# EAGLE board 22257 v10 (EAGLE 9.7.0)
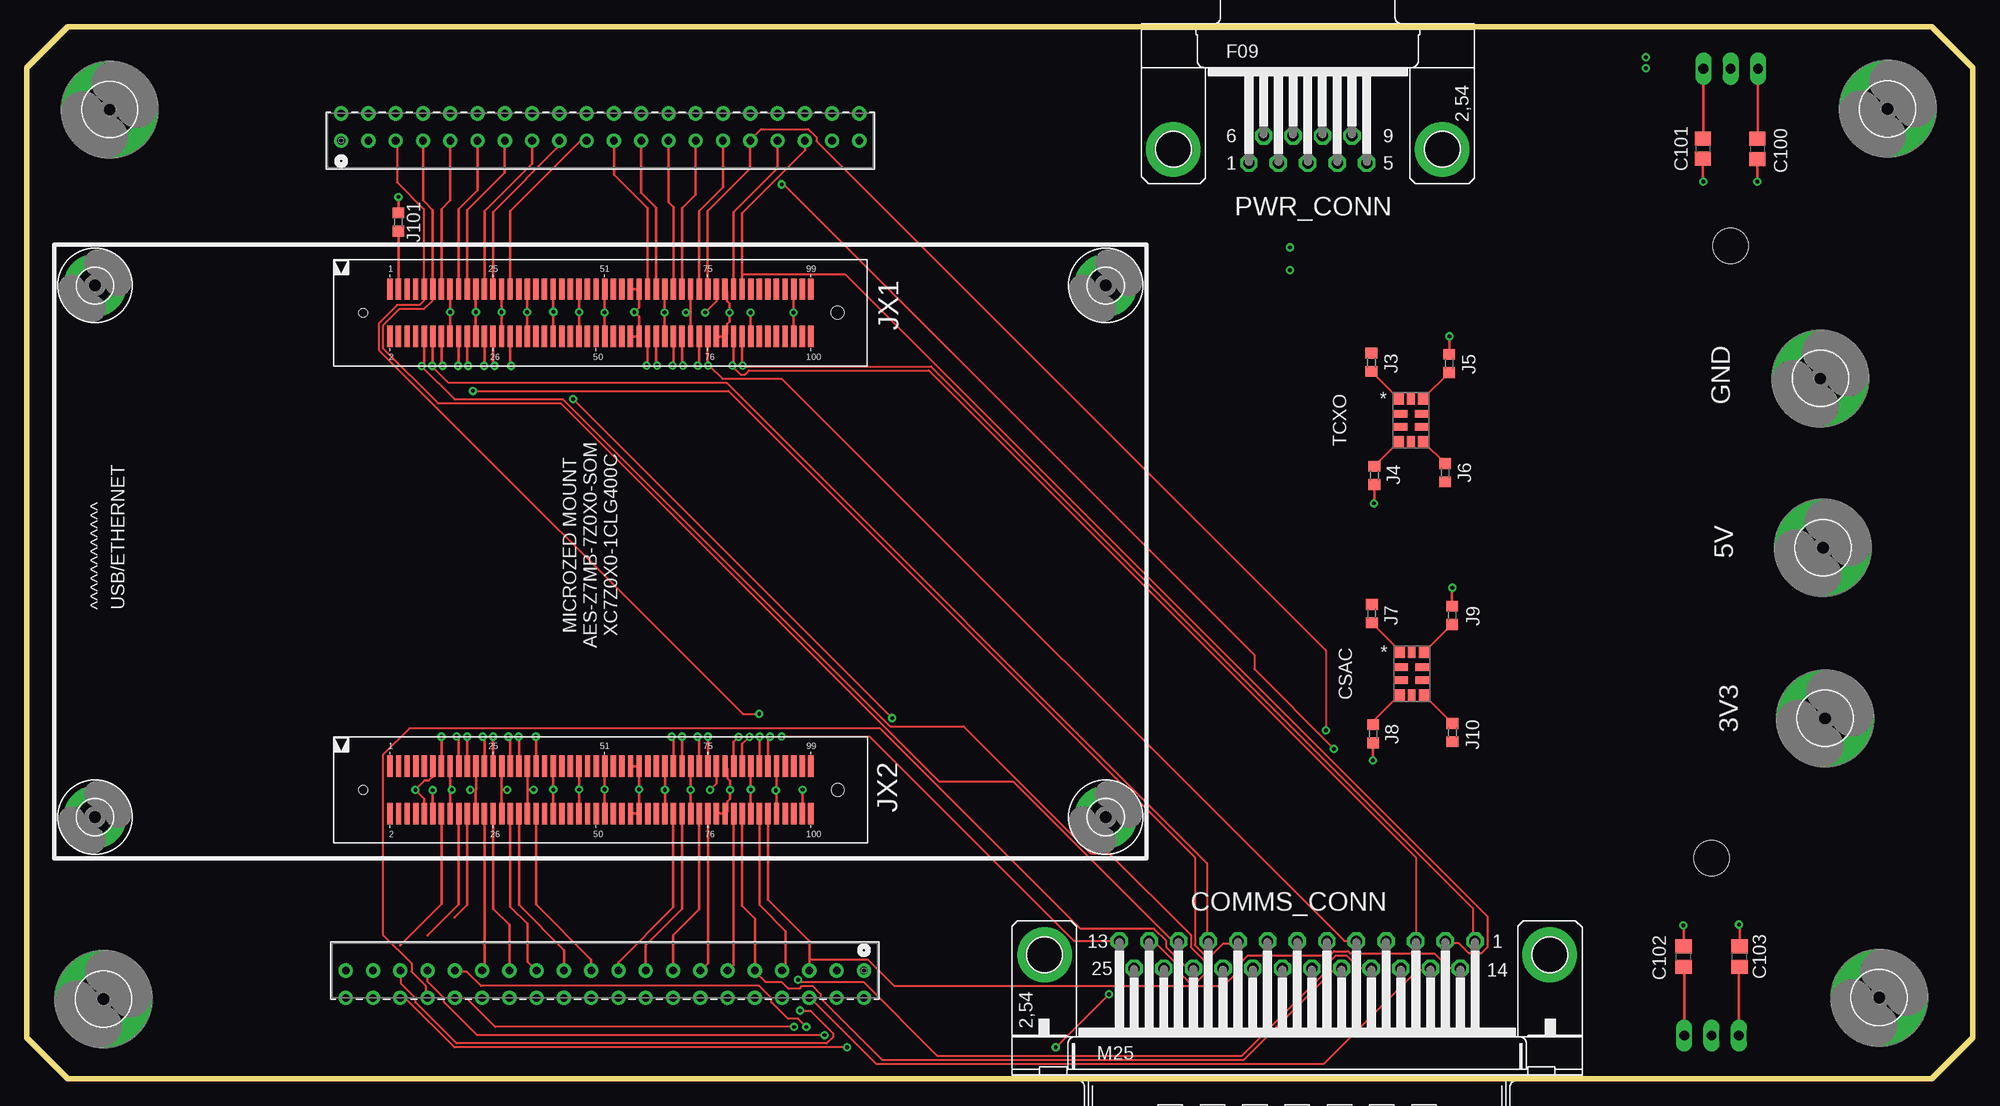
[diagram p0: board, top side]
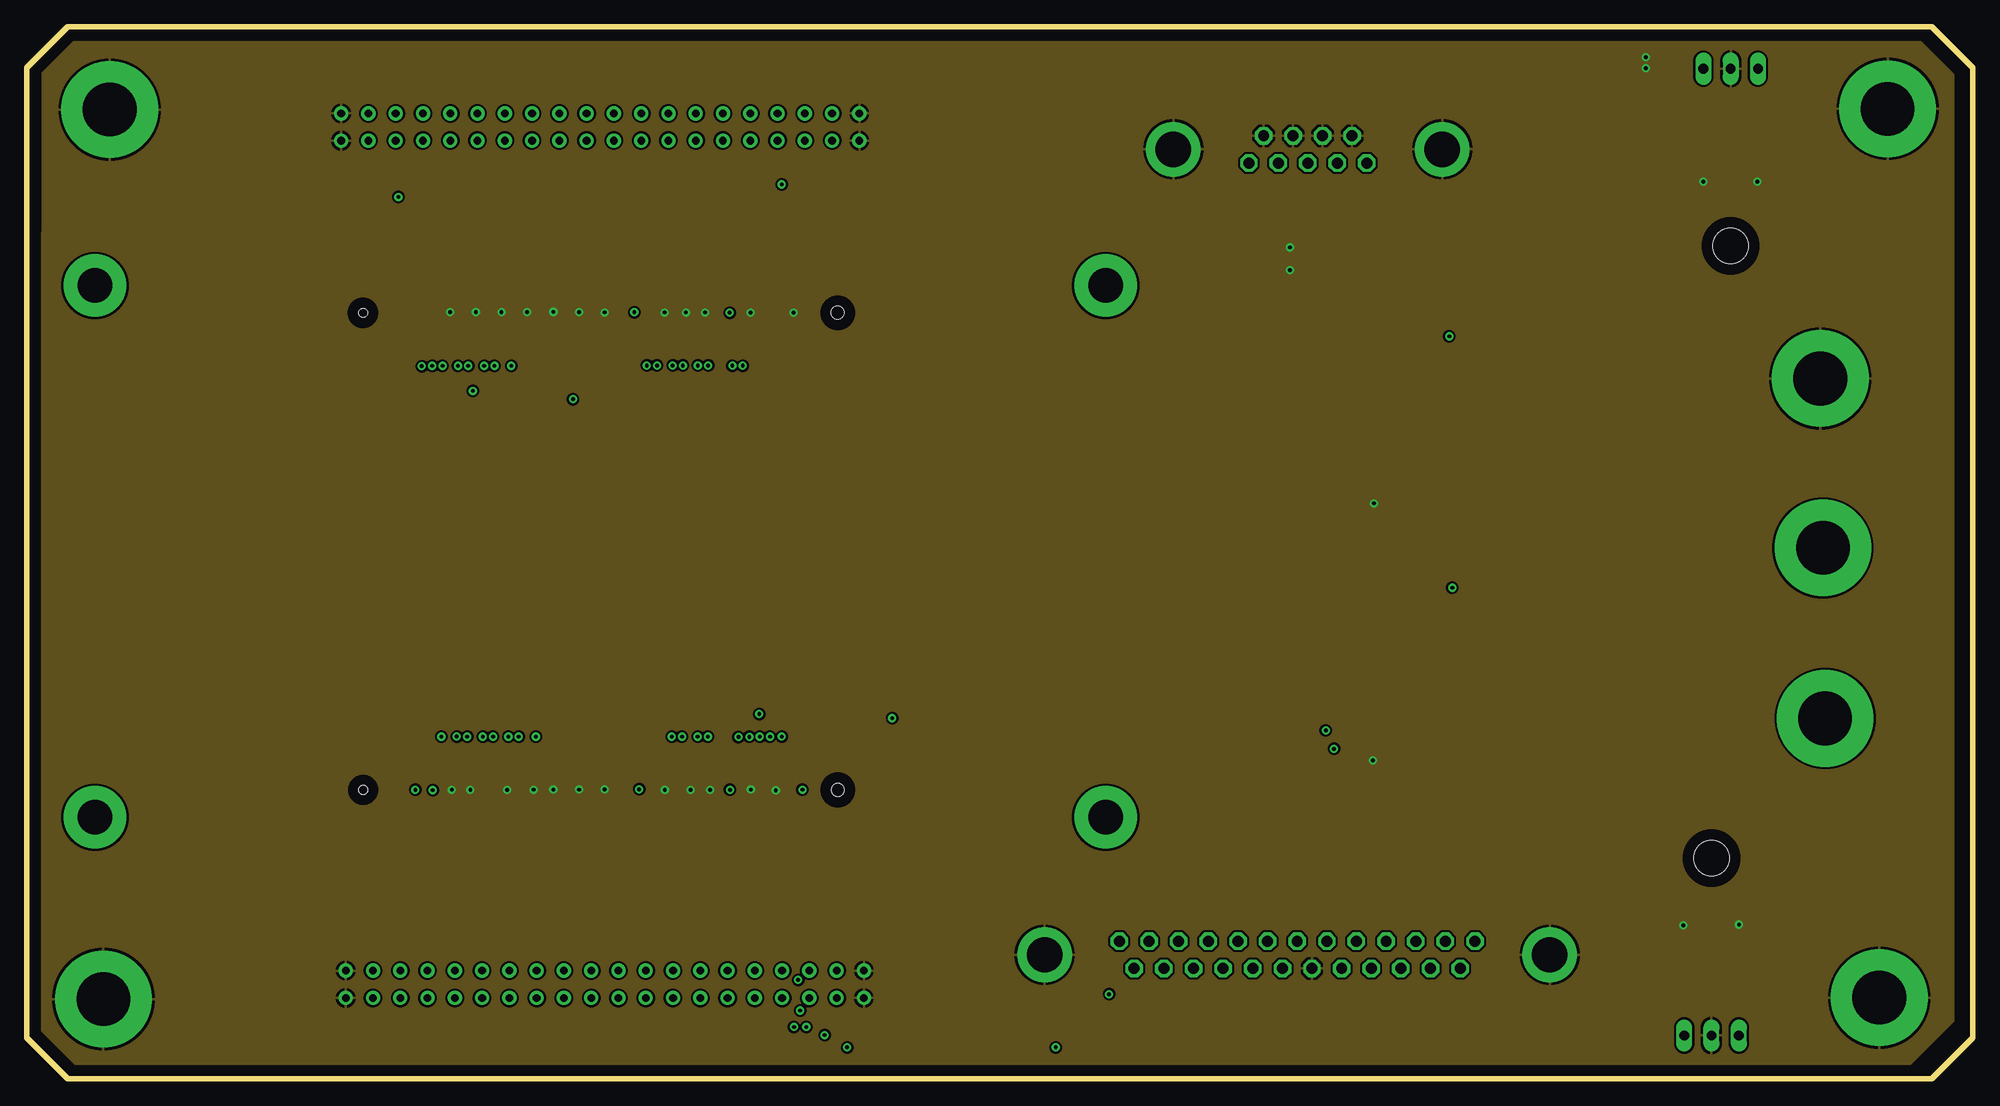
[diagram p1: board, inner layer Route2]
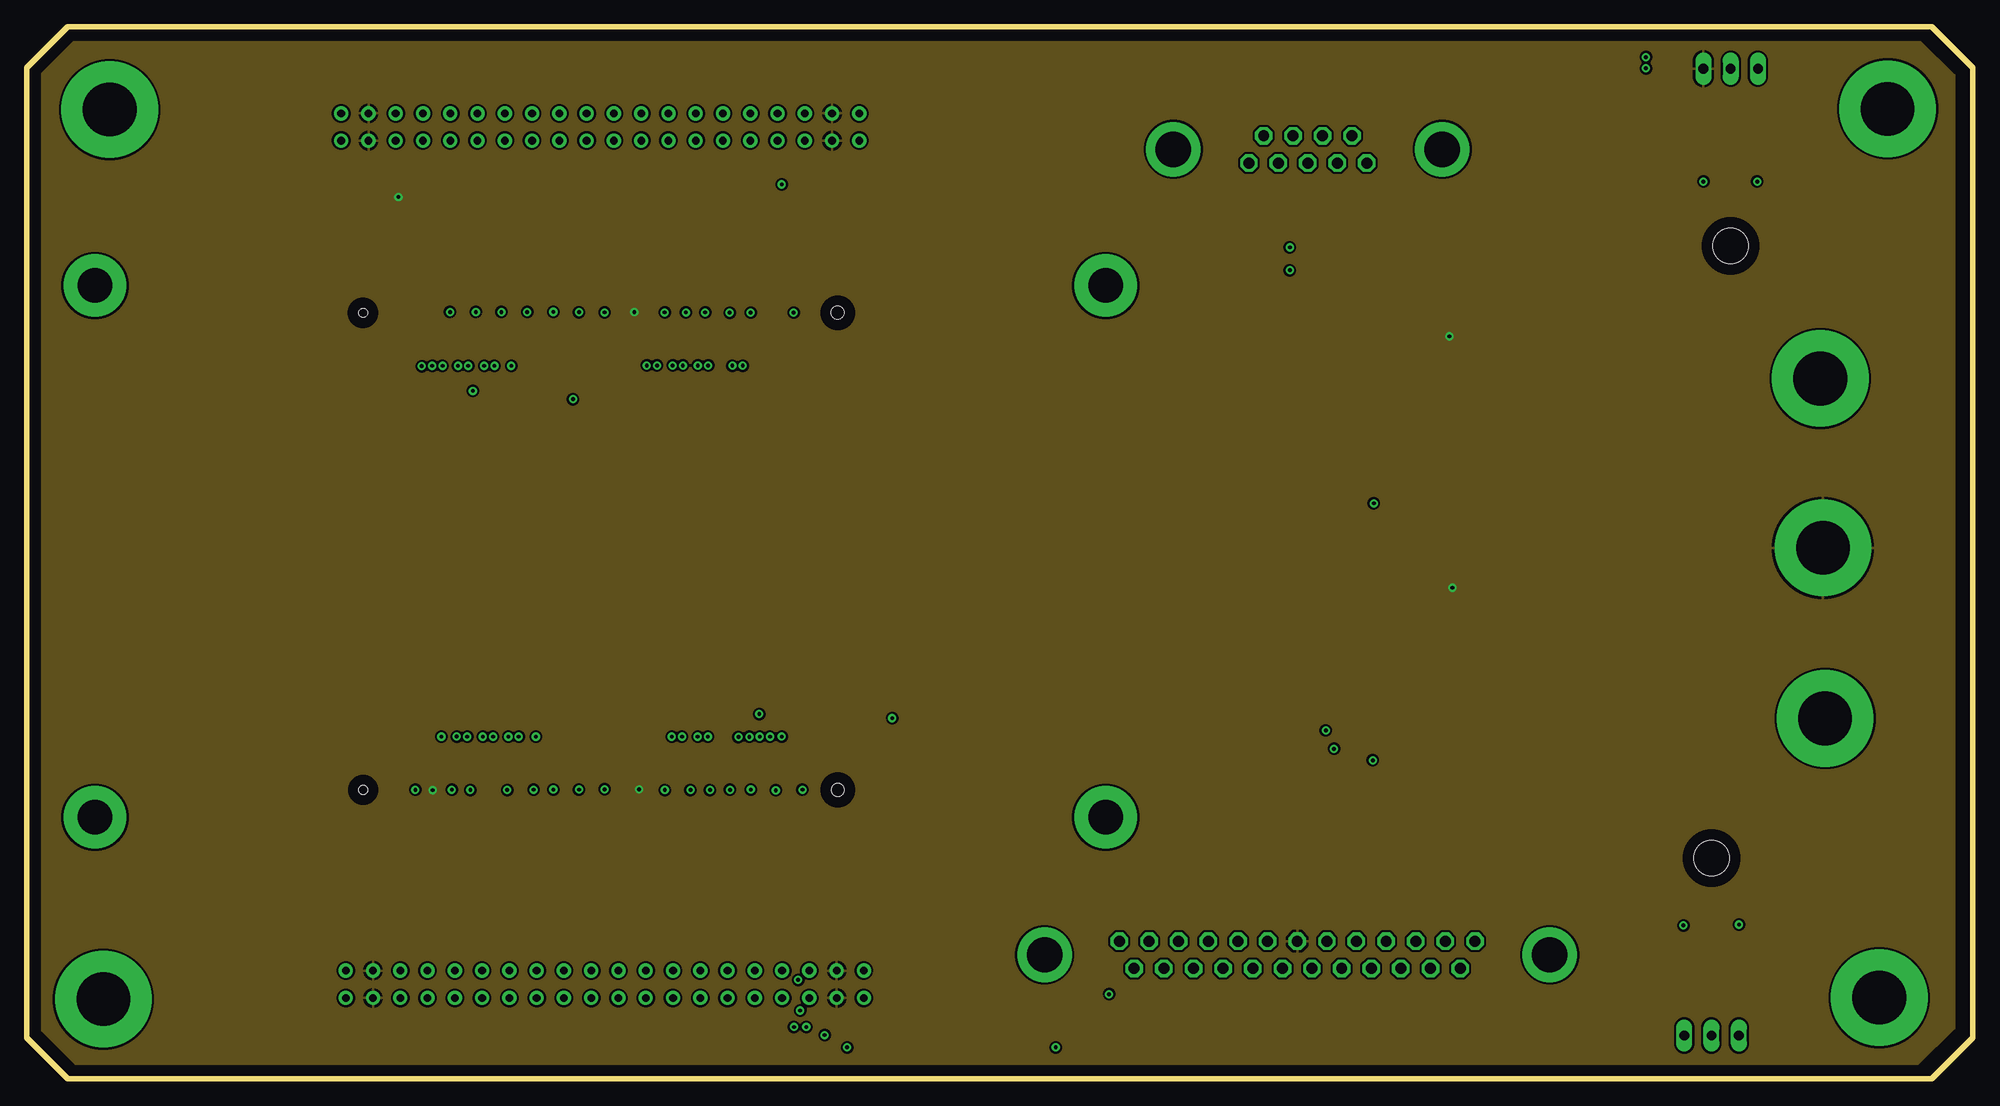
[diagram p2: board, inner layer Route3]
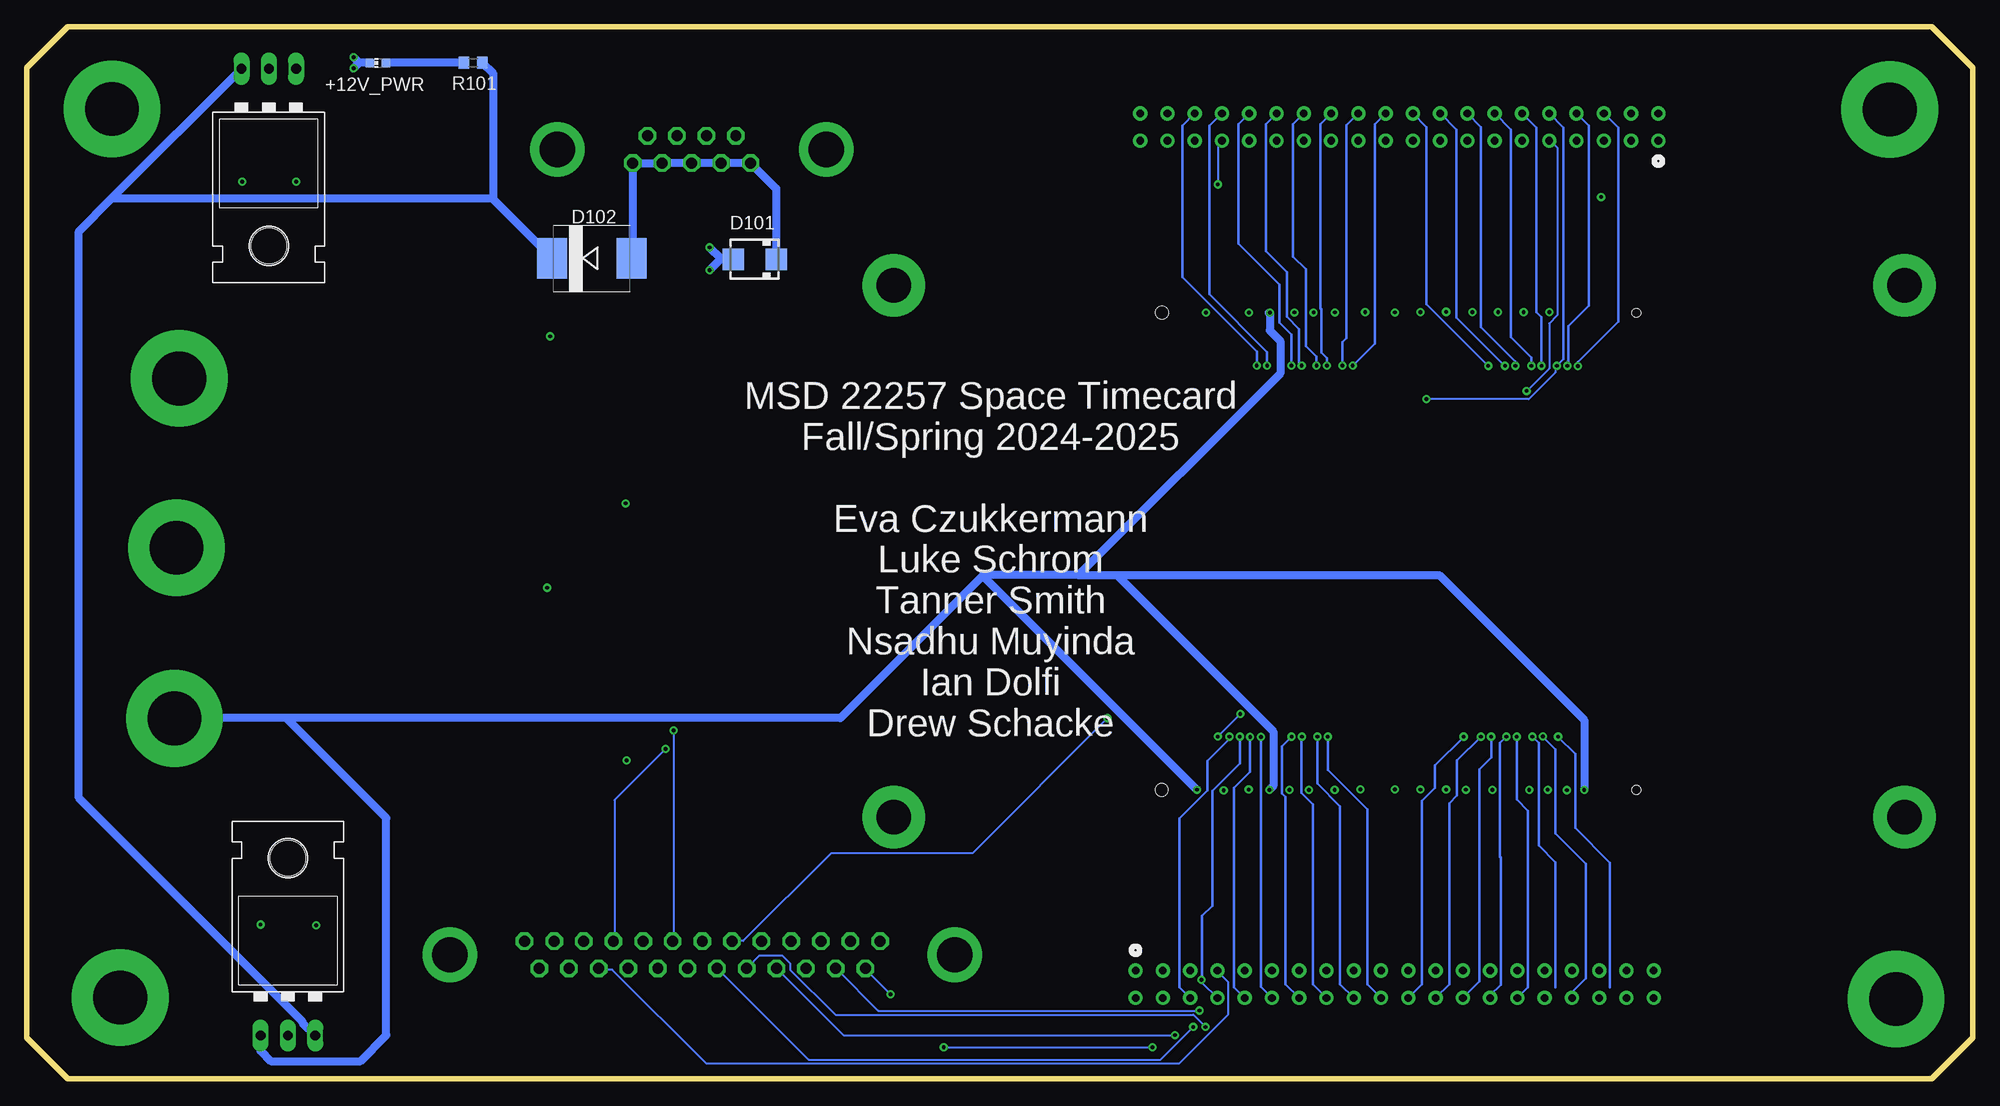
[diagram p3: board, bottom side, seen from below]

Size 181.22 x 97.99 mm. Coordinates in mm from the lower left corner, seen from the top.
Outline: 3.81,0 177.41,0 181.22,3.81 181.22,94.18 177.41,97.99 3.81,97.99 0,94.18 0,3.81 3.81,0
Copper layers (1*2*3*16): Top 0.035mm / dielectric 0.2mm / Route2 0.035mm / dielectric 0.2mm / Route3 0.035mm / dielectric 0.2mm / Bottom 0.035mm
Design rules "ciber_rules_revA *": minimum track width 7mil, minimum drill 0.35mm, track to track 8mil, track to pad 8mil, pad to pad 8mil, via to via 8mil, smd to smd 8mil, copper to edge 40mil, drill to drill 10mil, minimum pad ring 12mil, minimum via ring 8mil, stop-mask expansion 4mil, vias tented up to drill 15mil, thermal gap 10mil

## Footprints (pad centres in the part's own frame; a part is rotated, then mirrored left to right if it is on the bottom)
TO220-3 = drill 0.9 long: 1 -2.54,-16.51; 2 0,-16.51; 3 2.54,-16.51 | hole 3.302: 0,0
CHIP-LED0603 = smd 0.8 x 0.8: A 0,-0.75; C 0,0.75
C0805 = smd 1.3 x 1.5: 1 -0.95,0; 2 0.95,0
M25HP = drill 1.016 octagon: 1 16.561,1.27; 2 13.792,1.27; 3 11.049,1.27; 4 8.28,1.27; 5 5.512,1.27; 6 2.769,1.27; 7 0,1.27; 8 -2.769,1.27; 9 -5.512,1.27; 10 -8.28,1.27; 11 -11.049,1.27; 12 -13.792,1.27; 13 -16.561,1.27; 14 15.189,-1.27; 15 12.421,-1.27; 16 9.652,-1.27; 17 6.909,-1.27; 18 4.14,-1.27; 19 1.372,-1.27; 20 -1.372,-1.27; 21 -4.14,-1.27; 22 -6.909,-1.27; 23 -9.652,-1.27; 24 -12.421,-1.27; 25 -15.189,-1.27 | drill 3.302 pad 5.08: G1 -23.52,0; G2 23.52,0
CQFN10_5X3P2X0P95_SIT = smd 1.041 x 1.143: 1 -1.175,2.025; 4 -1.175,-2.025; 6 1.175,-2.025; 9 1.175,2.025 | smd 1.346 x 0.711: 2 -1.025,0.6; 3 -1.025,-0.6; 7 1.025,-0.6; 8 1.025,0.6 | smd 0.711 x 1.143: 5 0,-2.025; 10 0,2.025
SMA = smd 2 x 2: A 2,0; C -2,0
SMC = smd 2.8 x 3.8: A 3.7,0; C -3.7,0
3,2-PAD = drill 3.2 pad 5.842: B3,2 0,0
5,0-PAD = drill 5 pad 9: B5 0,0
CON40_2X20_TU_HTS_SAI = drill 0.711 pad 1.27: 1 -24.13,-1.27; 2 -24.13,1.27; 3 -21.59,-1.27; 4 -21.59,1.27; 5 -19.05,-1.27; 6 -19.05,1.27; 7 -16.51,-1.27; 8 -16.51,1.27; 9 -13.97,-1.27; 10 -13.97,1.27; 11 -11.43,-1.27; 12 -11.43,1.27; 13 -8.89,-1.27; 14 -8.89,1.27; 15 -6.35,-1.27; 16 -6.35,1.27; 17 -3.81,-1.27; 18 -3.81,1.27; 19 -1.27,-1.27; 20 -1.27,1.27; 21 1.27,-1.27; 22 1.27,1.27; 23 3.81,-1.27; 24 3.81,1.27; 25 6.35,-1.27; 26 6.35,1.27; 27 8.89,-1.27; 28 8.89,1.27; 29 11.43,-1.27; 30 11.43,1.27; 31 13.97,-1.27; 32 13.97,1.27; 33 16.51,-1.27; 34 16.51,1.27; 35 19.05,-1.27; 36 19.05,1.27; 37 21.59,-1.27; 38 21.59,1.27; 39 24.13,-1.27; 40 24.13,1.27
R0603 = smd 1 x 1.1: 1 -0.85,0; 2 0.85,0
61083-102402LF = smd 0.5 x 2: 1 2.5,2.2; 2 2.5,-2.2; 3 3.3,2.2; 4 3.3,-2.2; 5 4.1,2.2; 6 4.1,-2.2; 7 4.9,2.2; 8 4.9,-2.2; 9 5.7,2.2; 10 5.7,-2.2; 11 6.5,2.2; 12 6.5,-2.2; 13 7.3,2.2; 14 7.3,-2.2; 15 8.1,2.2; 16 8.1,-2.2; 17 8.9,2.2; 18 8.9,-2.2; 19 9.7,2.2; 20 9.7,-2.2; 21 10.5,2.2; 22 10.5,-2.2; 23 11.3,2.2; 24 11.3,-2.2; 25 12.1,2.2; 26 12.1,-2.2; 27 12.9,2.2; 28 12.9,-2.2; 29 13.7,2.2; 30 13.7,-2.2; 31 14.5,2.2; 32 14.5,-2.2; 33 15.3,2.2; 34 15.3,-2.2; 35 16.1,2.2; 36 16.1,-2.2; 37 16.9,2.2; 38 16.9,-2.2; 39 17.7,2.2; 40 17.7,-2.2; 41 18.5,2.2; 42 18.5,-2.2; 43 19.3,2.2; 44 19.3,-2.2; 45 20.1,2.2; 46 20.1,-2.2; 47 20.9,2.2; 48 20.9,-2.2; 49 21.7,2.2; 50 21.7,-2.2; 51 22.5,2.2; 52 22.5,-2.2; 53 23.3,2.2; 54 23.3,-2.2; 55 24.1,2.2; 56 24.1,-2.2; 57 24.9,2.2; 58 24.9,-2.2; 59 25.7,2.2; 60 25.7,-2.2; 61 26.5,2.2; 62 26.5,-2.2; 63 27.3,2.2; 64 27.3,-2.2; 65 28.1,2.2; 66 28.1,-2.2; 67 28.9,2.2; 68 28.9,-2.2; 69 29.7,2.2; 70 29.7,-2.2; 71 30.5,2.2; 72 30.5,-2.2; 73 31.3,2.2; 74 31.3,-2.2; 75 32.1,2.2; 76 32.1,-2.2; 77 32.9,2.2; 78 32.9,-2.2; 79 33.7,2.2; 80 33.7,-2.2; 81 34.5,2.2; 82 34.5,-2.2; 83 35.3,2.2; 84 35.3,-2.2; 85 36.1,2.2; 86 36.1,-2.2; 87 36.9,2.2; 88 36.9,-2.2; 89 37.7,2.2; 90 37.7,-2.2; 91 38.5,2.2; 92 38.5,-2.2; 93 39.3,2.2; 94 39.3,-2.2; 95 40.1,2.2; 96 40.1,-2.2; 97 40.9,2.2; 98 40.9,-2.2; 99 41.7,2.2; 100 41.7,-2.2 | hole 0.8: 0,0 | hole 1.2: 44.2,0
DSUB9HP = drill 1.016 octagon: 1 -5.486,-1.27; 2 -2.743,-1.27; 3 0,-1.27; 4 2.743,-1.27; 5 5.486,-1.27; 6 -4.115,1.27; 7 -1.372,1.27; 8 1.372,1.27; 9 4.115,1.27 | drill 3.302 pad 5.08: G1 -12.522,0; G2 12.522,0

## Placement (x,y rotation side)
3V3_REG  MCP1826S  [TO220-3]  156.9,20.55 0 top
5V_REG  MCP1826S  [TO220-3]  158.68,77.58 180 top
+12V_PWR  [CHIP-LED0603]  148.51,94.63 90 bottom
C100  10uF  [C0805]  161.15,86.6 270 top
C101  10uF  [C0805]  156.08,86.64 270 top
C102  10uF  [C0805]  154.3,11.39 90 top
C103  10uF  [C0805]  159.51,11.4 90 top
COMMS_CONN  [M25HP]  118.31,11.55 0 top
CSAC  SIT5356AI-FQ-33VT-25.000000XCQFN10_5X3P2X0P95_SIT  [CQFN10_5X3P2X0P95_SIT]  128.97,37.73 0 top
D101  SMAJ15A  [SMA]  113.44,76.35 180 bottom
D102  [SMC]  128.59,76.43 0 bottom
E$1  [3,2-PAD]  100.48,73.9 180 top
E$2  [3,2-PAD]  100.48,24.37 180 top
E$3  [3,2-PAD]  6.35,24.37 180 top
E$4  [3,2-PAD]  6.35,73.9 180 top
H1  MOUNT-PAD-ROUND5.0  [5,0-PAD]  167.03,65.23 0 top
H2  MOUNT-PAD-ROUND5.0  [5,0-PAD]  167.47,33.57 0 top
H3  MOUNT-PAD-ROUND5.0  [5,0-PAD]  167.27,49.46 0 top
H801  MOUNT-PAD-ROUND5.0  [5,0-PAD]  173.3,90.35 0 top
H802  MOUNT-PAD-ROUND5.0  [5,0-PAD]  7.72,90.28 0 top
H803  MOUNT-PAD-ROUND5.0  [5,0-PAD]  7.13,7.42 0 top
H804  MOUNT-PAD-ROUND5.0  [5,0-PAD]  172.51,7.56 0 top
J1  TD-120-G-AACON40_2X20_TU_HTS_SAI  [CON40_2X20_TU_HTS_SAI]  53.4,88.66 0 top
J2  TD-120-G-AACON40_2X20_TU_HTS_SAI  [CON40_2X20_TU_HTS_SAI]  53.83,8.8 180 top
J3  0  [R0603]  125.23,66.74 270 top
J4  0  [R0603]  125.5,56.22 90 top
J5  0  [R0603]  132.46,66.64 90 top
J6  0  [R0603]  132.1,56.45 270 top
J7  0  [R0603]  125.26,43.33 270 top
J8  0  [R0603]  125.38,32.13 90 top
J9  0  [R0603]  132.73,43.16 90 top
J10  0  [R0603]  132.77,32.24 270 top
J101  0  [R0603]  34.61,79.8 270 top
JX1  61083-102402LF  [61083-102402LF]  31.31,71.36 0 top
JX2  61083-102402LF  [61083-102402LF]  31.32,26.91 0 top
PWR_CONN  [DSUB9HP]  119.3,86.58 0 top
R101  4.7k  [R0603]  139.65,94.65 0 bottom
TCXO  SIT5356AI-FQ-33VT-25.000000XCQFN10_5X3P2X0P95_SIT  [CQFN10_5X3P2X0P95_SIT]  128.91,61.34 0 top

## Library data of the parts
3V3_REG 5V_REG JX1 JX2 PWR_CONN = interface_board
+12V_PWR = led
C100-C103 = rcl; SPICEPREFIX: C
COMMS_CONN = interface_board; OC_FARNELL: unknown; OC_NEWARK: unknown
CSAC TCXO = 2024-12-02_23-14-43_Library; COPYRIGHT: Copyright (C) 2024 Ultra Librarian. All rights reserved.; MANUFACTURER_PART_NUMBER: SIT5356AI-FQ-33VT-25.000000X; MFR_NAME: SiTime; TYPE: Oscillators
D101 D102 = diode
E$1-E$4 H1-H3 H801-H804 = holes
J1 J2 = 2024-11-13_22-37-46_Library; COPYRIGHT: Copyright (C) 2024 Ultra Librarian. All rights reserved.; MANUFACTURER_PART_NUMBER: TD-120-G-AA; MFR_NAME: Samtec Inc
J3-J10 J101 R101 = rcl; SPICEPREFIX: R

## Nets
3V3: 3V3_REG.3 C103.1 H2.B5 JX1.78 JX1.79 JX1.80 JX2.10 JX2.11 JX2.78 JX2.79 JX2.80 JX2.98
5V: 5V_REG.3 C101.1 COMMS_CONN.7 H3.B5 J1.3 J1.4 J1.37 J1.38 J2.3 J2.4 J2.37 J2.38 J5.2 J9.2 J101.1 JX1.57 JX1.58 JX1.59 JX1.60 JX2.12 JX2.57 JX2.58 JX2.59 JX2.60
34_N17: COMMS_CONN.4 J1.33 JX1.81
34_N18: JX1.47
34_N20: JX1.48
34_P14: J1.16 JX1.24
34_P15: COMMS_CONN.3 J1.34 JX1.82
34_P16: COMMS_CONN.1 J1.36 JX1.84
34_P18: COMMS_CONN.2 J1.35 JX1.83
34_P19: JX1.49
34_P20: JX1.50
34_R14: J1.18 JX1.26
34_R16: J1.25 JX1.67
34_R17: J1.27 JX1.69
34_R18: J1.28 JX1.70
34_R19: COMMS_CONN.13 J1.5 JX1.9
34_T10: COMMS_CONN.9 J1.9 JX1.13
34_T11: COMMS_CONN.11 J1.7 JX1.11
34_T12: COMMS_CONN.10 J1.8 JX1.12
34_T14: J1.15 JX1.23
34_T15: J1.17 JX1.25
34_T16: JX1.35
34_T17: J1.26 JX1.68
34_T19: COMMS_CONN.12 J1.6 JX1.10
34_T20: JX1.53
34_U12: COMMS_CONN.8 J1.10 JX1.14
34_U13: J1.11 JX1.17
34_U14: JX1.41
34_U15: JX1.43
34_U17: JX1.37
34_U18: JX1.42
34_U19: JX1.44
34_U20: JX1.55
34_V12: J1.12 JX1.18
34_V13: J1.13 JX1.19
34_V15: JX1.36
34_V16: J1.22 JX1.62
34_V17: J1.29 JX1.73
34_V18: COMMS_CONN.6 J1.31 JX1.75
34_V20: JX1.54
34_W13: J1.14 JX1.20
34_W14: J1.20 JX1.30
34_W15: JX1.38
34_W16: J1.24 JX1.64
34_W18: J1.30 JX1.74
34_W19: COMMS_CONN.5 J1.32 JX1.76
34_W20: JX1.56
34_Y14: JX1.32
34_Y16: J1.19 JX1.29
34_Y17: JX1.31
34_Y18: J1.21 JX1.61
34_Y19: J1.23 JX1.63
35_A20: JX2.20
35_B19: JX2.18
35_B20: JX2.19
35_C20: JX2.17
35_D18: J2.28 JX2.25
35_D19: J2.29 JX2.24
35_D20: J2.27 JX2.26
35_E17: J2.30 JX2.23
35_E18: J2.26 JX2.29
35_E19: J2.24 JX2.31
35_F16: J2.25 JX2.30
35_F17: J2.23 JX2.32
35_F19: JX2.62
35_F20: JX2.64
35_G14: JX2.13
35_G15: J2.13 JX2.76
35_G17: JX2.61
35_G18: JX2.63
35_G19: J2.20 JX2.67
35_G20: J2.18 JX2.69
35_H15: J2.15 JX2.74
35_H16: JX2.53
35_H17: JX2.55
35_H18: JX2.56
35_H20: J2.17 JX2.70
35_J14: J2.14 JX2.75
35_J15: JX2.14
35_J16: COMMS_CONN.14 J2.5 JX2.90
35_J18: JX2.54
35_J19: JX2.44
35_J20: J2.19 JX2.68
35_K14: J2.16 JX2.73
35_K16: COMMS_CONN.16 J2.7 JX2.88
35_K17: JX2.48
35_K18: JX2.50
35_K19: JX2.42
35_L14: J2.11 JX2.82
35_L15: COMMS_CONN.18 J2.9 JX2.84
35_L16: JX2.47
35_L17: JX2.49
35_L19: J2.22 JX2.35
35_L20: JX2.37
35_M14: COMMS_CONN.17 J2.8 JX2.87
35_M15: COMMS_CONN.15 J2.6 JX2.89
35_M17: JX2.41
35_M18: JX2.43
35_M19: J2.21 JX2.36
35_M20: JX2.38
35_N15: J2.12 JX2.81
35_N16: J2.10 JX2.83
+12V_IN: D101.C D102.A PWR_CONN.1 PWR_CONN.2 PWR_CONN.3 PWR_CONN.4 PWR_CONN.5
+12V_LOCAL: 3V3_REG.1 5V_REG.1 C100.1 C102.1 D102.C R101.2
CANH: COMMS_CONN.21 J2.32
CANL: COMMS_CONN.20 J2.31
CLK_CSAC: J10.2
CLK_TCXO: J6.2
GND: 3V3_REG.2 5V_REG.2 +12V_PWR.C C100.2 C101.2 C102.2 C103.2 COMMS_CONN.19 COMMS_CONN.G1 COMMS_CONN.G2 D101.A H1.B5 H801.B5 H802.B5 H803.B5 H804.B5 J1.1 J1.2 J1.39 J1.40 J2.1 J2.2 J2.39 J2.40 J4.1 J8.1 JX1.15 JX1.16 JX1.21 JX1.22 JX1.27 JX1.28 JX1.33 JX1.34 JX1.39 JX1.40 JX1.45 JX1.46 JX1.51 JX1.52 JX1.65 JX1.66 JX1.71 JX1.72 JX1.77 JX1.86 JX1.95 JX1.96 JX2.15 JX2.16 JX2.21 JX2.22 JX2.27 JX2.28 JX2.33 JX2.34 JX2.39 JX2.40 JX2.45 JX2.46 JX2.51 JX2.52 JX2.65 JX2.66 JX2.71 JX2.72 JX2.77 JX2.85 JX2.86 JX2.91 JX2.92 PWR_CONN.6 PWR_CONN.7 PWR_CONN.8 PWR_CONN.9 PWR_CONN.G1 PWR_CONN.G2
N$1: +12V_PWR.A R101.1
N$15: J3.2 TCXO.1
N$16: J4.2 TCXO.4
N$17: J6.1 TCXO.6
N$18: J5.1 TCXO.9
N$19: CSAC.4 J8.2
N$20: CSAC.1 J7.2
N$27: CSAC.9 J9.1
N$28: CSAC.6 J10.1
PPS_IN: COMMS_CONN.25 J2.36
PPS_OUT: COMMS_CONN.24 J2.35
PWR_EN: J101.2 JX1.3
TOD_IN: COMMS_CONN.23 J2.34
TOD_OUT: COMMS_CONN.22 J2.33
VC_CSAC: J7.1
VC_TCXO: J3.1

## Tracks (layer width: path | path; a pad name or v marks a point on that pad's centre or on a via)
3V3  (via drill 0.35)
  Top 0.254: v72.23,26.92 v72.22,26.92 JX2.98 | JX2.10 37.02,26.07 v36.18,26.92 37.04,27.78 37.41,27.78 37.82,28.19 JX2.11 | JX2.78 JX2.80 65.24,24.93 65.24,25.85 65.49,26.09 v65.49,26.92 65.49,27.73 65.24,27.97 65.24,28.89 JX2.79 | JX1.78 JX1.80 65.23,69.38 65.23,70.3 65.46,70.52 v65.46,71.37 65.46,72.2 65.23,72.42 65.23,73.34 JX1.79 | 3V3_REG.3 159.44,10.38 C103.1
  Bottom 0.762: 65.56,71.37 v65.46,71.37 65.46,69.72 64.48,68.74 64.48,65.69 83.26,46.91 | 83.26,46.91 79.7,46.91 | 79.7,46.91 49.68,46.91 36.18,33.41 v36.18,26.92 | v72.23,26.92 92.2,46.89 92.2,46.91 92.13,46.91 | 83.26,46.91 92.13,46.91 | 83.27,46.9 83.26,46.91 | v65.49,26.92 65.14,27.26 65.14,32.36 79.7,46.91 | 92.13,46.91 105.44,33.6 157.05,33.6 | H2.B5 167.45,33.6 157.05,33.6 | 157.05,33.6 147.74,24.29 147.74,4.06 150.15,1.65 158.5,1.65 159.44,2.59 3V3_REG.3
5V  (via drill 0.35)
  Top 0.254: JX2.58 JX2.60 v57.02,26.96 JX2.59 JX2.57 | JX1.58 JX1.60 57.01,70.98 v56.58,71.41 57.01,71.85 JX1.59 JX1.57 | JX2.12 37.8,24.73 v37.8,26.89 | J101.1 v34.61,82.13 v34.6,82.14 | J5.2 v132.46,69.15 v132.47,69.16 | v132.75,45.75 132.73,45.73 J9.2 | 5V_REG.3 156.14,87.65 C101.1
  pour Route3: 4.56,1.35 176.08,1.3 179.5,4.73 179.5,93.46 176.21,96.76 4.34,96.76 1.37,93.8 1.37,4.54
34_N17  (via drill 0.35)
  Top 0.178: v121.74,30.74 114.31,38.17 114.31,39.5 70.49,83.32 v70.3,83.32
  Top 0.254: J1.33 69.91,84.84 65.81,80.74 JX1.81
  Bottom 0.178: v121.74,30.74 126.5,25.97 126.5,12.83 COMMS_CONN.4 | v70.3,83.32 70.3,86.93 69.92,87.32 J1.33
34_P14  (via drill 0.35)
  Top 0.254: JX1.24 42.61,66.43 v42.59,66.41
  Bottom 0.254: J1.16 45.78,88.66 45.78,70.02 42.59,66.82 v42.59,66.41
34_P15  (via drill 0.35)
  Top 0.178: COMMS_CONN.3 129.36,12.83 129.36,20.64 84.02,65.98 67.25,65.98 66.87,65.6 66.49,65.6 65.73,66.36 v65.71,66.42
  Top 0.254: JX1.82 65.81,66.53 v65.71,66.42
  Bottom 0.254: J1.34 71.07,88.77 71.07,73.08 65.71,67.72 v65.71,66.42
34_P16  (via drill 0.35)
  Top 0.178: COMMS_CONN.1 134.69,12.83 134.69,15.88 84.21,66.36 66.68,66.36 v66.67,66.42
  Top 0.254: JX1.84 66.61,66.48 v66.67,66.42
  Bottom 0.254: J1.36 73.61,88.77 73.61,74.68 66.67,67.74 v66.67,66.42
34_P18
  Top 0.178: 66.61,74.93 76.21,74.93 136.02,15.12 136.02,12.26 135.45,11.69 134.31,11.69 133.36,12.64 132.21,12.64 COMMS_CONN.2
  Top 0.254: J1.35 72.45,86.48 66.61,80.64 66.61,74.93 JX1.83
34_R14  (via drill 0.35)
  Top 0.254: JX1.26 43.41,66.54 v43.55,66.41
  Bottom 0.254: J1.18 48.06,88.4 48.06,70.92 v43.55,66.41
34_R16
  Top 0.254: J1.25 59.75,81.67 60.21,81.21 JX1.67
34_R17
  Top 0.254: J1.27 62.29,82.37 61.01,81.09 JX1.69
34_R18  (via drill 0.35)
  Top 0.254: JX1.70 61.01,66.53 v61.1,66.44
  Bottom 0.254: J1.28 63.28,88.94 63.28,76.6 62.09,75.41 62.09,68.25 61.1,67.26 v61.1,66.44
34_R19  (via drill 0.35)
  Top 0.178: J1.5 34.49,87.32 34.49,83.51 36.96,81.03 36.96,73.6 JX1.9 36.96,73.41 36.96,72.46 36.58,72.08 34.49,72.08 32.77,70.36 32.77,67.88 66.68,33.98 v68.2,33.98 | v70.3,31.88 78.49,31.88 97.54,12.83 101.73,12.83 COMMS_CONN.13
  Bottom 0.178: v68.2,33.98 v70.3,31.88
34_T10  (via drill 0.35)
  Top 0.178: v41.53,64.07 65.35,64.07 108.78,20.64 108.78,12.45 109.54,11.69 110.5,11.69 111.45,12.64 112.78,12.64 COMMS_CONN.9
  Top 0.254: J1.9 39.43,81.82 38.61,81 JX1.13
  Bottom 0.178: v41.53,64.07 39.44,66.17 39.44,70.36 38.68,71.12 38.68,86.74 39.25,87.32 J1.9
34_T11
  Top 0.178: COMMS_CONN.11 107.26,12.83 106.69,12.83 91.83,27.69 84.97,27.69 49.73,62.93 38.3,62.93 33.15,68.08 33.15,70.17 34.68,71.7 36.96,71.7 37.73,72.46 37.73,73.41 JX1.11
  Top 0.254: J1.7 36.89,81.85 37.81,80.93 JX1.11
34_T12  (via drill 0.35)
  Top 0.178: COMMS_CONN.10 109.92,12.83 109.92,20.07 65.16,64.84 39.25,64.84 37.73,66.36 v37.76,66.41
  Top 0.254: JX1.12 37.81,66.47 v37.76,66.41
  Bottom 0.254: v37.76,66.41 37.76,66.76 37.66,66.86 37.66,70.1 35.76,72 35.76,88.8 J1.8
34_T14
  Top 0.254: J1.15 47.05,85.25 42.61,80.81 JX1.23
34_T15
  Top 0.254: J1.17 49.59,86.93 43.41,80.75 JX1.25
34_T17  (via drill 0.35)
  Top 0.254: JX1.68 60.21,66.51 v60.14,66.44
  Bottom 0.254: J1.26 60.74,88.94 60.74,71.75 60.67,71.68 60.67,67.65 60.14,67.12 v60.14,66.44
34_T19  (via drill 0.35)
  Top 0.178: COMMS_CONN.12 104.59,12.64 105.16,12.64 107.45,10.35 107.45,9.78 108.21,9.02 108.97,9.02 109.92,9.97 109.92,10.73 108.4,12.26 108.4,13.4 100.78,21.02 99.07,21.02 87.25,32.83 80.4,32.83 49.92,63.31 39.82,63.31 36.77,66.36 v36.78,66.39
  Top 0.254: JX1.10 37.01,66.63 v36.78,66.39
  Bottom 0.254: J1.6 33,88.58 33,70.52 36.78,66.74 v36.78,66.39
34_U12  (via drill 0.35)
  Top 0.178: v50.87,63.31 v80.59,33.59
  Top 0.254: JX1.14 38.61,66.51 v38.72,66.41
  Bottom 0.178: v80.59,33.59 93.16,21.02 106.3,21.02 114.5,12.83 115.45,12.83 COMMS_CONN.8 | v50.87,63.31 41.34,63.31 38.87,65.79 38.87,66.36 v38.72,66.41
  Bottom 0.254: J1.10 38.12,88.62 38.12,67.04 38.64,66.53 38.64,66.49 v38.72,66.41
34_U13
  Top 0.254: J1.11 41.97,82.76 40.21,81 JX1.17
34_V12  (via drill 0.35)
  Top 0.254: JX1.18 40.21,66.47 v40.15,66.41
  Bottom 0.254: J1.12 40.62,88.57 40.62,71.42 40.15,70.95 v40.15,66.41
34_V13
  Top 0.254: J1.13 44.51,84.4 41.01,80.9 JX1.19
34_V16  (via drill 0.35)
  Top 0.254: JX1.62 57.81,66.52 v57.73,66.44
  Bottom 0.254: J1.22 55.66,88.94 55.66,68.51 v57.73,66.44
34_V17
  Top 0.254: J1.29 64.83,83.06 62.61,80.84 JX1.73
34_V18  (via drill 0.35)
  Top 0.178: v120.97,32.45 120.97,39.88 73.54,87.32 73.54,87.7 72.78,88.46 68.4,88.46 67.44,87.51 J1.31
  Top 0.254: J1.31 67.37,84.77 63.41,80.81 JX1.75
  Bottom 0.178: v120.97,32.45 120.97,12.83 COMMS_CONN.6
34_W13  (via drill 0.35)
  Top 0.254: JX1.20 41.01,66.5 v41.11,66.41
  Bottom 0.254: J1.14 43.01,88.43 43.01,69.1 41.11,67.19 v41.11,66.41
34_W14  (via drill 0.35)
  Top 0.254: JX1.30 45.01,66.51 v45.12,66.41
  Bottom 0.254: J1.20 50.86,88.66 50.86,72.16 v45.12,66.41
34_W16  (via drill 0.35)
  Top 0.254: JX1.64 58.61,66.52 v58.69,66.44
  Bottom 0.254: J1.24 58.32,88.82 58.32,68.98 58.69,68.61 v58.69,66.44
34_W18  (via drill 0.35)
  Top 0.254: JX1.74 62.61,66.57 v62.49,66.44
  Bottom 0.254: v62.49,66.44 62.72,66.68 62.72,69.83 63.87,70.98 63.87,75.13 65.82,77.08 65.82,88.94 J1.30
34_W19  (via drill 0.35)
  Top 0.178: COMMS_CONN.5 123.64,12.83 122.69,12.83 70.3,65.22 64.78,65.22 63.63,66.36 v63.45,66.44
  Top 0.254: JX1.76 63.41,66.48 v63.45,66.44
  Bottom 0.254: 63.45,66.4 v63.45,66.44 63.45,69.31 64.57,70.42 64.57,73.98 68.36,77.78 68.36,88.94 J1.32
34_Y16
  Top 0.254: J1.19 51.56,87.39 45.01,80.84 JX1.29
34_Y18
  Top 0.254: J1.21 54.67,84.22 57.81,81.08 JX1.61
34_Y19
  Top 0.254: J1.23 57.21,82.54 58.61,81.14 JX1.63
35_A20
  Top 0.254: 39.86,15.05 41.02,16.21 JX2.20
35_B19
  Top 0.254: 37.32,13.36 40.22,16.27 JX2.18
35_B20  (via drill 0.35)
  Top 0.254: JX2.19 41.02,31.85 v41.01,31.86
  Bottom 0.254: v41.01,31.86 40.42,31.27 40.42,21.73 38.87,20.18 38.87,8.52
35_C20  (via drill 0.35)
  Top 0.254: JX2.17 40.22,31.69 v40.03,31.89
  Bottom 0.254: 37.32,8.06 36.02,9.36 36.02,20.04 38.87,22.88 38.87,30.68 40.03,31.84 v40.03,31.89
35_D18  (via drill 0.35)
  Top 0.254: JX2.25 v43.42,31.86
  Bottom 0.254: v43.42,31.86 44.02,31.27 44.02,20.69 43.95,20.61 43.95,8.76 44.94,7.77 J2.28
35_D19
  Top 0.254: J2.29 42.62,10.3 JX2.24
35_D20
  Top 0.254: J2.27 44.94,14.34 43.42,15.85 JX2.26
35_E17  (via drill 0.35)
  Top 0.254: JX2.23 42.62,31.71 v42.46,31.86
  Bottom 0.254: 42.66,31.67 v42.46,31.86 42.46,26.02 41.41,24.96 41.41,8.52 J2.30
35_E18  (via drill 0.35)
  Top 0.254: JX2.29 45.02,31.68 v44.84,31.86
  Bottom 0.254: v44.84,31.86 44.84,29.92 45.93,28.83 45.93,9.08 J2.26
35_E19  (via drill 0.35)
  Top 0.254: JX2.31 45.82,31.84 v45.8,31.86
  Bottom 0.254: J2.24 48.75,8.8 48.75,25.66 48.02,26.39 48.02,29.65 v45.8,31.86
35_F16
  Top 0.254: J2.25 46.64,10.91 46.64,14.42 45.02,16.03 JX2.30
35_F17
  Top 0.254: J2.23 50.02,11.99 45.82,16.18 JX2.32
35_G14  (via drill 0.35)
  Top 0.254: JX2.13 38.62,31.85 v38.61,31.86
  Bottom 0.254: v38.61,31.86 37,30.26 37,23.36 33.77,20.13 33.77,8.54
35_G15
  Top 0.254: J2.13 63.42,10.78 JX2.76
35_G19  (via drill 0.35)
  Top 0.254: JX2.67 60.22,31.7 v60.06,31.86
  Bottom 0.254: J2.20 56.37,8.8 56.37,25.08 60.06,28.77 v60.06,31.86
35_G20  (via drill 0.35)
  Top 0.254: JX2.69 v61.02,31.86
  Bottom 0.254: J2.18 58.91,8.8 58.91,25.4 61.02,27.51 v61.02,31.86
35_H15
  Top 0.254: J2.15 60.18,13.34 62.62,15.79 JX2.74
35_H20
  Top 0.254: J2.17 57.64,12.43 61.02,15.81 JX2.70
35_J14  (via drill 0.35)
  Top 0.254: JX2.75 v63.42,31.86 v63.43,31.86
  Bottom 0.254: J2.14 63.99,8.8 63.99,26.27 64.33,26.61 64.33,30.97 v63.43,31.86
35_J15
  Top 0.254: 34.78,12.46 38.62,16.3 JX2.14
35_J16
  Top 0.178: 72.88,11.12 78.3,11.12 80.78,8.64 111.45,8.64 112.59,9.78 112.59,10.35 113.73,11.5 121.35,11.5 121.74,11.88 123.07,11.88 123.26,11.69 131.07,11.69 132.4,10.35 133.36,10.35 COMMS_CONN.14
  Top 0.254: J2.5 72.88,11.12 72.88,12.81 69.02,16.67 JX2.90
35_J20
  Top 0.254: J2.19 55.1,10.85 60.2,15.95 60.2,24.68 JX2.68
35_K14  (via drill 0.35)
  Top 0.254: JX2.73 62.62,31.71 v62.47,31.86
  Bottom 0.254: J2.16 61.45,8.8 61.45,25.54 62.52,26.62 62.52,31.82 v62.47,31.86
35_K16
  Top 0.254: J2.7 70.67,10.41 70.67,13.74 68.22,16.19 JX2.88
  Bottom 0.178: COMMS_CONN.16 127.83,10.16 126.69,10.16 117.93,1.4 73.92,1.4 69.35,5.97 69.35,9.02 70.3,9.97 J2.7
35_L14
  Top 0.254: J2.11 65.82,10.64 JX2.82
35_L15
  Top 0.178: COMMS_CONN.18 122.31,10.16 121.74,10.16 113.35,1.78 79.64,1.78 73.92,7.5 73.92,7.88 73.16,8.64 72.21,8.64 72.02,8.45 70.87,8.45 70.3,9.02 68.78,9.02 67.82,9.97 J2.9
  Top 0.254: J2.9 67.8,14.92 66.62,16.09 JX2.84
35_L19  (via drill 0.35)
  Top 0.254: JX2.35 47.42,31.85 v47.41,31.86
  Bottom 0.254: J2.22 51.29,8.8 51.29,25.88 50.07,27.11 50.07,29.2 v47.41,31.86
35_M14  (via drill 0.35)
  Top 0.178: v71.82,9.21 72.02,9.02 77.92,9.02 84.78,2.16 113.16,2.16 120.97,9.97 120.97,10.54 121.93,11.5 122.88,11.5 124.02,10.35 125.16,10.35 COMMS_CONN.17
  Top 0.254: JX2.87 68.22,31.84 v68.25,31.86
  Bottom 0.178: v71.82,9.21 71.76,9.21
  Bottom 0.254: v68.25,31.86 68.25,29.38 70.82,26.81 70.82,16.11 71.76,15.17 71.76,9.21 71.76,8.96 J2.8
35_M15  (via drill 0.35)
  Top 0.178: COMMS_CONN.15 130.69,10.16 129.55,10.16 120.78,1.4 79.06,1.4 72.97,7.5 J2.6
  Top 0.254: JX2.89 69.02,31.68 v69.21,31.86
  Bottom 0.254: J2.6 73.87,8.52 73.87,24.28 71.28,26.87 71.28,29.61 69.21,31.68 v69.21,31.86
35_M19
  Top 0.254: J2.21 52.56,11.1 47.42,16.23 JX2.36
35_N15  (via drill 0.35)
  Top 0.254: JX2.81 65.82,31.39 v66.27,31.83
  Bottom 0.254: J2.12 66.27,8.55 v66.27,31.83
35_N16  (via drill 0.35)
  Top 0.254: JX2.83 66.62,31.18 v67.29,31.85
  Bottom 0.254: v67.29,31.85 67.29,28.59 68.79,27.09 68.79,8.52 J2.10
+12V_IN
  Bottom 0.762: D101.C 111.44,82.93 PWR_CONN.1 PWR_CONN.2 PWR_CONN.3 PWR_CONN.4 PWR_CONN.5 124.79,76.54 D102.A
+12V_LOCAL
  Top 0.254: 3V3_REG.1 154.36,10.38 C102.1 | 5V_REG.1 161.22,87.62 C100.1
  Bottom 0.762: D102.C 137.76,81.9 | 137.76,81.9 137.88,82.02 173.29,82.02 | R101.2 137.76,93.62 137.76,81.9 | 3V3_REG.1 155.56,5.24 155.56,5.35 176.38,26.17 176.38,78.92 173.29,82.02 | 5V_REG.1 173.29,82.02
CANH  (via drill 0.35)
  Top 0.178: v71.44,4.83 43.63,4.83 40.96,7.5 40.01,7.5 J2.32
  Bottom 0.178: v71.44,4.83 72.59,5.97 105.92,5.97 110.11,10.16 110.11,10.73 110.88,11.5 112.97,11.5 114.12,10.35 COMMS_CONN.21
CANL  (via drill 0.35)
  Top 0.178: v72.59,4.83 71.82,5.59 70.87,5.59 69.35,7.12 69.35,7.5 68.2,8.64 42.3,8.64 40.96,9.97 40.01,9.97 J2.31
  Bottom 0.178: v72.59,4.83 75.63,1.78 108.4,1.78 116.78,10.16 COMMS_CONN.20
GND  (via drill 0.35)
  Top 0.254: JX1.16 v39.41,71.42 JX1.15 | JX1.22 v41.81,71.42 | v41.81,71.42 v41.82,71.42 | JX1.21 v41.81,71.42 | JX1.28 v44.2,71.42 v44.21,71.42 JX1.27 | JX1.34 46.6,69.16 v46.6,71.42 46.61,71.42 JX1.33 | JX1.40 49.01,71.44 | 49.01,71.44 v49.03,71.44 | JX1.39 49.01,71.44 | JX1.46 51.43,69.16 v51.43,71.41 51.43,73.56 JX1.45 | JX1.52 v53.81,71.39 | v53.81,71.39 | JX1.51 v53.81,71.39 | JX1.66 v59.41,71.39 | v59.41,71.39 v59.4,71.39 | JX1.65 v59.41,71.39 | JX1.72 61.81,71.39 | JX1.71 61.81,71.39 | JX1.86 v67.4,71.37 | JX1.95 v71.41,71.37 JX1.96 | JX2.16 39.42,26.93 | JX2.15 39.42,26.93 | JX2.21 41.82,26.91 41.81,26.91 | JX2.28 44.22,26.91 | JX2.27 44.22,26.91 | JX2.34 46.62,26.93 | JX2.33 46.62,26.93 | JX2.40 v49.02,26.94 | v49.02,26.94 v49.03,26.94 | JX2.39 v49.02,26.94 | JX2.46 v51.43,26.94 v51.42,26.94 JX2.45 | JX2.52 53.82,26.96 | 53.82,26.96 v53.81,26.96 | JX2.51 53.82,26.96 | JX2.66 v59.42,26.91 | v59.42,26.91 | JX2.65 v59.42,26.91 | JX2.72 61.82,26.91 v61.81,26.91 61.81,29.11 JX2.71 | JX2.86 v67.42,26.94 JX2.85 | JX2.91 69.82,26.94 | JX2.77 64.22,27.51 v63.62,26.9 | 61.81,71.39 v61.38,71.39 | JX1.77 64.21,72.43 v63.16,71.38 | 39.42,26.93 v39.58,26.93 | 69.82,26.94 v69.75,26.88 | JX2.92 69.82,26.94 | v41.3,26.91 41.81,26.91 | 41.81,26.91 41.81,24.72 JX2.22 | 44.22,26.91 v44.73,26.91 | 46.62,26.93 v47.2,26.93 | J4.1 125.49,53.65 v125.44,53.6 | J8.1 125.36,31.28 v125.36,29.66 | C102.2 154.3,14.27 v154.28,14.28 | C103.2 159.51,14.31 v159.45,14.37 | C100.2 v161.15,83.57 | C101.2 156.08,83.63 v156.14,83.57
  Bottom 0.762: v117.62,75.33 116.6,76.35 D101.A 116.53,76.35 v117.62,77.44 | v150.79,94.13 150.29,94.63 +12V_PWR.C 150.25,94.63 v150.79,95.17
  pour Route2: 4.51,1.34 175.38,1.34 179.47,5.42 179.47,93.51 176.15,96.83 4.15,96.83 1.45,93.76 1.29,4.55
N$1
  Bottom 0.762: R101.1 147.74,94.65 +12V_PWR.A
N$15
  Top 0.254: TCXO.1 127.73,63.38 J3.2
N$16
  Top 0.254: J4.2 125.49,57.08 TCXO.4
N$17
  Top 0.254: TCXO.6 J6.1
N$18
  Top 0.254: TCXO.9 130.08,63.41 J5.1
N$19
  Top 0.254: CSAC.4 125.38,33.28 J8.2
N$20
  Top 0.254: CSAC.1 127.8,39.94 J7.2
N$27
  Top 0.254: J9.1 130.17,39.75 CSAC.9
N$28
  Top 0.254: J10.1 CSAC.6
PPS_IN  (via drill 0.35)
  Top 0.178: v76.4,2.92 39.82,2.92 35.25,7.5 34.87,7.5 J2.36 | v100.78,7.88 v95.83,2.92
  Bottom 0.178: v95.83,2.92 v76.4,2.92 | v100.78,7.88 103.07,10.16 COMMS_CONN.25
PPS_OUT  (via drill 0.35)
  Top 0.178: v72.02,6.35 72.97,6.35 75.06,4.26 75.06,3.88 74.49,3.31 40.01,3.31 36.2,7.12 36.2,7.5 34.87,8.83 34.87,9.97 J2.35
  Bottom 0.178: v72.02,6.35 101.92,6.35 105.73,10.16 COMMS_CONN.24
PWR_EN
  Top 0.254: J101.2 JX1.3
TOD_IN
  Top 0.178: J2.34 37.15,7.69 37.15,8.64 35.82,9.97 35.82,10.73 33.15,13.4 33.15,30.17 35.63,32.64 79.44,32.64 98.11,13.97 104.97,13.97 106.11,12.83 106.11,12.26 108.02,10.35 108.59,10.35 COMMS_CONN.23
TOD_OUT  (via drill 0.35)
  Top 0.178: v74.3,4.07 41.92,4.07 38.87,7.12 38.87,7.5 37.34,9.02 37.34,9.97 J2.33
  Bottom 0.178: v74.3,4.07 105.16,4.07 111.26,10.16 COMMS_CONN.22

## Text on the board
tPlace: GND | MICROZED MOUNT / AES-Z7MB-7Z0X0-SOM / XC7Z0X0-1CLG400C | 5V | ^^^^^^^^^^^^ / USB/ETHERNET | 3V3
bPlace: MSD 22257 Space Timecard / Fall/Spring 2024-2025 / / Eva Czukkermann / Luke Schrom / Tanner Smith / Nsadhu Muyinda / Ian Dolfi / Drew Schacke